# EAGLE board Smartwatch-BASIC-BOTTOM (EAGLE 9.6.2)
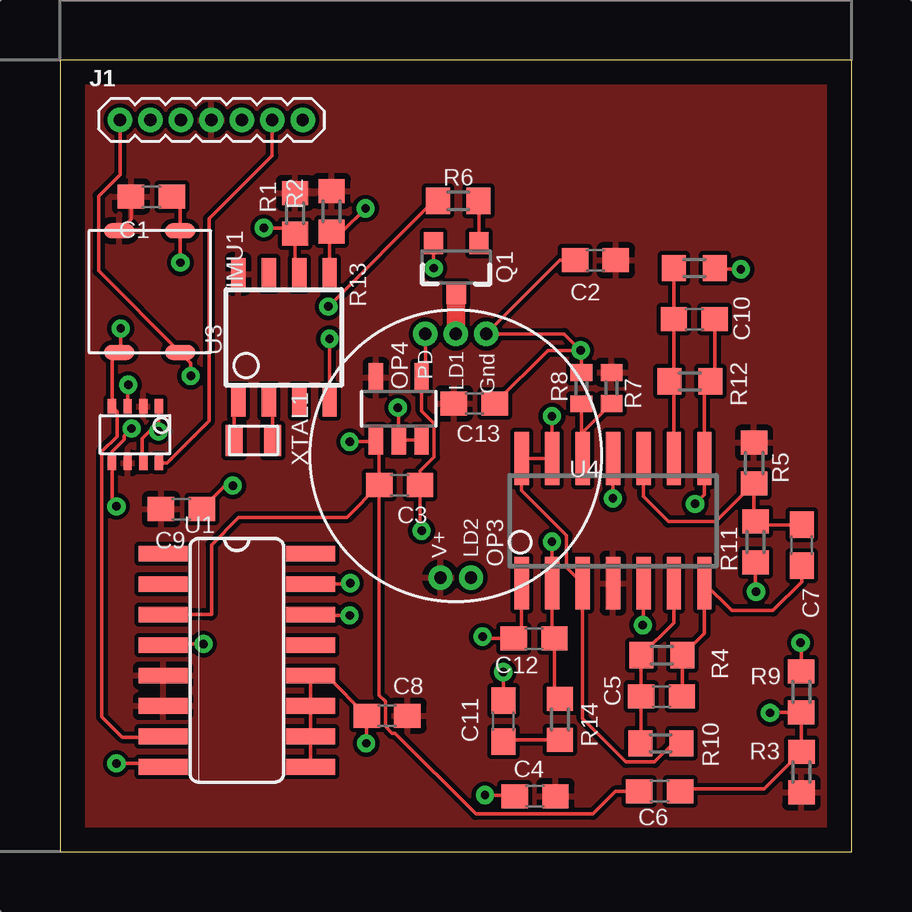
[diagram p0: board, top side]
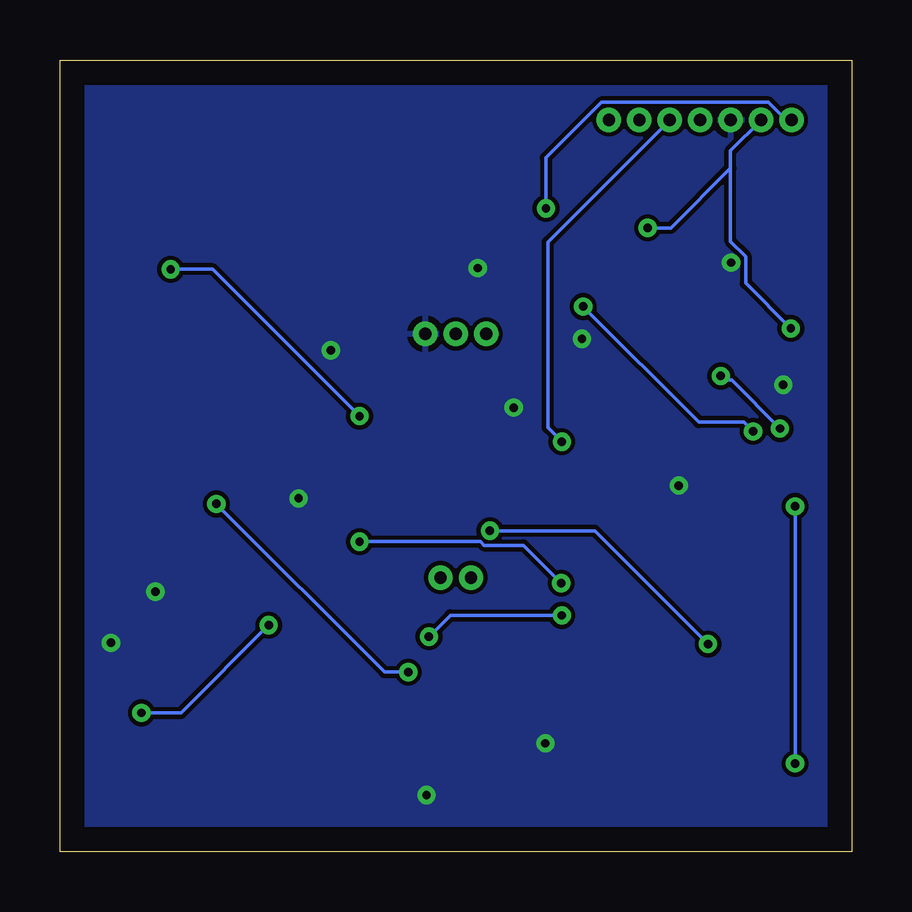
[diagram p1: board, bottom side, seen from below]

Size 33 x 33 mm. Coordinates in mm from the lower left corner, seen from the top.
Outline: 0,0 33,0 33,33 0,33 0,0
Copper layers (1*16): Top 0.035mm / dielectric 1.5mm / Bottom 0.035mm
Design rules "default": minimum track width 6mil, minimum drill 0.35mm, track to track 6mil, track to pad 6mil, pad to pad 6mil, via to via 6mil, smd to smd 6mil, copper to edge 40mil, drill to drill 6mil, minimum pad ring 10mil, minimum via ring 8mil, stop-mask expansion 4mil, vias tented up to drill 0mil, thermal gap 10mil

## Footprints (pad centres in the part's own frame; a part is rotated, then mirrored left to right if it is on the bottom)
C0603 = smd 1.1 x 1: 1 -0.85,0; 2 0.85,0
LSM6DS3_CAST = smd 0.635 x 1.27: 1 -2.54,1.27; 2 -2.54,-1.27; 3 2.54,-1.27; 4 2.54,1.27
1X07_1.27MM = drill 0.508 pad 1: 1 0,0; 2 1.27,0; 3 2.54,0; 4 3.81,0; 5 5.08,0; 6 6.35,0; 7 7.62,0
SO14 = smd 0.6 x 2.2: 1 -3.81,-2.6; 2 -2.54,-2.6; 3 -1.27,-2.6; 4 0,-2.6; 5 1.27,-2.6; 6 2.54,-2.6; 7 3.81,-2.6; 8 3.81,2.6; 9 2.54,2.6; 10 1.27,2.6; 11 0,2.6; 12 -1.27,2.6; 13 -2.54,2.6; 14 -3.81,2.6
SOT23-5 = smd 0.6 x 1.2: 1 -0.95,-1.306; 2 0,-1.306; 3 0.95,-1.306; 4 0.95,1.306; 5 -0.95,1.306
SOT23-3 = smd 0.8 x 0.9: 1 -0.95,-1; 2 0.95,-1; 3 0,1.1
R0603 = smd 1 x 1.1: 1 -0.85,0; 2 0.85,0
R0402 = smd 0.7 x 0.9: 1 -0.65,0; 2 0.65,0
SO16 = smd 0.66 x 2.032: 1 -4.445,-3.073; 2 -3.175,-3.073; 3 -1.905,-3.073; 4 -0.635,-3.073; 5 0.635,-3.073; 6 1.905,-3.073; 7 3.175,-3.073; 8 4.445,-3.073; 9 4.445,3.073; 10 3.175,3.073; 11 1.905,3.073; 12 0.635,3.073; 13 -0.635,3.073; 14 -1.905,3.073; 15 -3.175,3.073; 16 -4.445,3.073
PPG.MODULE.2 = drill 0.508 pad 0.94: GND 1.27,5.08; LD1 0,5.08; LD2 0.635,-5.08; PD -1.27,5.08; V+ -0.635,-5.08
SO8 = smd 1.3 x 0.6: 1 -2.65,1.905; 2 -2.65,0.635; 3 -2.65,-0.635; 4 -2.65,-1.905; 5 2.65,-1.905; 6 2.65,-0.635; 7 2.65,0.635; 8 2.65,1.905
SOT-23-8 = smd 0.35 x 0.6: 1 -0.991,-1.176; 2 -0.341,-1.176; 3 0.309,-1.176; 4 0.959,-1.176; 5 0.959,1.176; 6 0.309,1.176; 7 -0.341,1.176; 8 -0.991,1.176
2-SMD.NOLEAD.2.0MMTO1.2MM = smd 0.7 x 1.3: P$1 -0.8,0; P$2 0.8,0

## Placement (x,y rotation side)
C1  100n  [C0603]  3.81,27.3 180 top
C2  1u  [C0603]  22.32,24.65 180 top
C3  100n  [C0603]  14.16,15.28 180 top
C4  100n  [C0603]  19.81,2.31 0 top
C5  2.2n  [C0603]  25.07,6.47 180 top
C6  2.2u  [C0603]  25,2.51 0 top
C7  2.2u  [C0603]  30.92,12.77 90 top
C8  100n  [C0603]  13.63,5.66 0 top
C9  100n  [C0603]  5.06,14.28 180 top
C10  2.2n  [C0603]  26.44,22.19 180 top
C11  22u  [C0603]  18.48,5.44 270 top
C12  22n  [C0603]  19.76,8.88 180 top
C13  100n  [C0603]  17.27,18.68 180 top
IMU1  LSM6DS3_CAST  [LSM6DS3_CAST]  3.74,23.34 270 top
J1  [1X07_1.27MM]  2.5,30.5 0 top
OP3  [SO14]  23.06,13.79 0 top
OP4  [SOT23-5]  14.12,18.45 0 top
Q1  [SOT23-3]  16.52,24.36 180 top
R1  10k  [R0603]  9.8,26.61 90 top
R2  10k  [R0603]  11.32,26.68 90 top
R3  220k  [R0603]  30.91,3.31 270 top
R4  10M  [R0603]  25.09,8.19 0 top
R5  220k  [R0603]  28.94,16.2 90 top
R6  [R0603]  16.61,27.13 0 top
R7  10k  [R0402]  22.99,19.32 90 top
R8  10k  [R0402]  21.74,19.31 270 top
R9  220k  [R0603]  30.9,6.66 270 top
R10  1M  [R0603]  25.05,4.51 180 top
R11  220k  [R0603]  29,12.9 90 top
R12  10M  [R0603]  26.27,19.6 0 top
R13  1M  [R0603]  26.44,24.32 180 top
R14  10k  [R0603]  20.84,5.51 270 top
U1  AD5242-SO16  [SO16]  7.37,7.97 270 top
U2  [PPG.MODULE.2]  16.5,16.5 0 top
U3  PCF8523  [SO8]  9.34,21.43 90 top
U4  AD5171  [SOT-23-8]  3.13,17.38 180 top
XTAL1  32.7680kHz  [2-SMD.NOLEAD.2.0MMTO1.2MM]  8.07,17.14 180 top

## Library data of the parts
C1-C13 R1-R14 = LinnesLab-Passives
IMU1 = LinnesLab-Sensors
J1 U2 = LinnesLab-Connectors
OP3 OP4 = LinnesLab-AnalogIC
Q1 = LinnesLab-DiscreteSemi
U1 U4 = LinnesLab-DigitalIC
U3 = LinnesLab-Clocks; DIGIKEY: 568-5306-1-ND; I2C_ADDRESS: 0x68h; MFN: PCF8523T/1,118; MFN_MANUFACTURER: NXP USA Inc.
XTAL1 = LinnesLab-Clocks; DIGIKEY: XC2288CT-ND; FREQ: 32.7680KHZ; LOAD_CAP: 12.5pF

## Nets
3.3V: C1.2 C2.1 C4.2 C8.2 C9.2 C13.2 IMU1.2 J1.4 OP3.4 OP4.5 R1.2 R2.2 R3.2 R5.2 R7.2 U1.5 U1.6 U2.V+ U3.8 U4.2 U4.6
A6/TIA: C3.2 C6.1 J1.5 OP4.1 U1.3
A7/PPG: J1.7
D26/LED.CTRL: J1.6 U4.8
G.A1: U1.2
G.A2: U1.16
G.O1: U1.1
G.O2: U1.13
G.W2: C12.1 OP3.2 R14.1 U1.15
GND: C1.1 C2.2 C4.1 C8.1 C9.1 C13.1 IMU1.1 J1.3 OP3.11 OP4.2 OP4.3 Q1.2 R8.1 R9.1 R11.1 U1.9 U1.10 U1.11 U1.12 U2.GND U3.4 U4.3
LED.C: Q1.3 U2.LD1
N$2: U3.2 XTAL1.P$1
N$3: U3.1 XTAL1.P$2
N$8: Q1.1 R6.2
N$9: R6.1 U4.1 U4.7
N$10: OP3.12 R7.1 R8.2
N$13: C6.2 OP3.5 R3.1 R9.2
N$15: C5.2 OP3.6 R4.1 R10.2
N$16: C5.1 C7.1 OP3.7 R4.2
N$17: C7.2 OP3.10 R5.1 R11.2
N$18: C10.2 OP3.9 R12.1 R13.2
N$19: C10.1 C11.1 OP3.8 R12.2
N$20: C11.2 R14.2
PD.C: C3.1 OP4.4 U1.4 U2.PD
PPG: C12.2 OP3.1 U1.14
SCL: IMU1.3 J1.2 R1.1 U1.7 U3.6 U4.4
SDA: IMU1.4 J1.1 R2.1 U1.8 U3.5 U4.5
VBATT: U3.3
VREF: OP3.3 OP3.13 OP3.14 R10.1 R13.1

## Tracks (layer width: path | path; a pad name or v marks a point on that pad's centre or on a via)
3.3V
  Top 0.152: C1.2 2.96,26.37 IMU1.2
  pour Top (isolate 0.178): 0.57,32.2 32.55,32.2 32.55,0.19 0.57,0.19
A6/TIA  (via drill 0.35)
  Top 0.152: C6.1 23.16,2.51 22.21,1.56 17.34,1.56 13.97,4.93 13.84,4.93 13.56,5.21 13.56,6.26 13.31,6.51 C3.2 | C3.2 13.31,17.01 OP4.1 13.11,17.08 v12.08,17.08 | C3.2 11.96,13.93 7.46,13.93 6.31,12.79 6.31,9.89 6.29,9.88 U1.3
  Bottom 0.152: v12.08,17.08 12.66,17.67 12.66,25.42 J1.5
D26/LED.CTRL
  Top 0.152: U4.8 4.47,16.2 6.21,17.95 6.21,26.38 8.85,29.02 J1.6
G.W2  (via drill 0.35)
  Top 0.152: R14.1 20.61,6.59 C12.1 20.52,8.98 OP3.2 v20.52,12.91 v20.51,12.92 | v12.11,11.19 12.06,11.15 U1.15
  Bottom 0.152: v20.51,12.92 15.48,12.92 15.33,12.77 13.68,12.77 v12.11,11.19
GND  (via drill 0.35)
  Top 0.152: R11.1 29,10.86 v29.02,10.84 | R9.1 30.9,8.68 v30.88,8.7 | C4.1 18.91,2.35 v17.72,2.35 | OP3.11 v23.05,14.72 | v11.24,21.38 U3.4 | v5.02,24.55 v5.01,24.56 IMU1.1 5.01,26.95 C1.1 | Q1.2 15.57,24.31 v15.59,24.32 | C2.2 20.84,24.65 U2.GND 21.02,21.58 v21.71,20.89 | v12.77,4.51 12.79,4.53 C8.1 11.11,7.34 10.48,7.34 | U1.12 10.48,7.34 | v14.09,18.51 14.12,18.47 OP4.2 OP4.3 | R8.1 21.74,20.86 v21.71,20.89 | U4.3 2.82,19.44 v2.85,19.46 | U1.9 U1.10 U1.11 10.45,7.3 10.48,7.34 | C13.1 20.33,20.89 v21.71,20.89 | C9.1 6.89,15.25 v7.2,15.25
  pour Bottom (isolate 0.178): 0.5,32.02 32.04,32.02 32.04,1.06 0.5,1.06
LED.C
  Top 0.762: Q1.3 16.52,21.6 U2.LD1
N$2
  Top 0.152: XTAL1.P$1 8.87,18.62 U3.2
N$3
  Top 0.152: XTAL1.P$2 7.27,18.62 U3.1
N$8
  Top 0.152: R6.2 17.47,27.11 Q1.1
N$9  (via drill 0.35)
  Top 0.152: U4.1 4.12,17.54 v4.1,17.52 3.72,17.52 3.42,17.21 3.42,16.25 U4.7 | v11.19,22.72 15.59,27.13 R6.1
  Bottom 0.152: v4.1,17.52 4.49,17.9 6.37,17.9 v11.19,22.72
N$10
  Top 0.152: R8.2 21.74,16.43 OP3.12 21.79,17.47 R7.1
N$13  (via drill 0.35)
  Top 0.152: C6.2 25.95,2.61 29.36,2.61 R3.1 30.91,5.8 R9.2 29.63,5.81 v29.61,5.78 | v24.3,9.44 24.32,9.47 OP3.5
  Bottom 0.152: v29.61,5.78 27.95,5.78 v24.3,9.44
N$15
  Top 0.152: OP3.6 25.59,9.54 R4.1 24.23,8.17 C5.2 24.23,4.54 R10.2
N$16
  Top 0.152: R4.2 25.94,8.17 | 25.94,8.17 25.94,6.49 C5.1 | C7.1 30.92,11.23 29.73,10.04 28.01,10.04 OP3.7 26.86,9.09 25.94,8.17
N$17
  Top 0.152: C7.2 29.13,13.62 R11.2 28.94,13.82 R5.1 27.34,13.76 25.36,13.76 24.32,14.8 OP3.10
N$18
  Top 0.152: R13.2 C10.2 25.59,19.78 R12.1 25.59,19.42 OP3.9
N$19  (via drill 0.35)
  Top 0.152: R12.2 27.11,19.42 | C10.1 27.29,19.6 27.11,19.42 | C11.1 v18.48,7.48 | v26.48,14.49 26.86,14.88 OP3.8 26.86,19.17 27.11,19.42
  Bottom 0.152: v26.48,14.49 19.47,7.48 v18.48,7.48
N$20
  Top 0.152: R14.2 18.56,4.66 C11.2
PD.C  (via drill 0.35)
  Top 0.152: U2.PD 15.23,19.92 OP4.4 15.07,18.37 15.6,17.84 15.6,16.45 15.01,15.86 C3.1 15.01,13.44 v15.08,13.38 | U1.4 4.34,8.65 v5.98,8.65
  Bottom 0.152: v5.98,8.65 10.71,13.38 v15.08,13.38
PPG  (via drill 0.35)
  Top 0.152: OP3.1 19.25,9.21 C12.2 17.69,8.88 v17.62,8.96 | v12.08,9.84 10.48,9.84 U1.14
  Bottom 0.152: v12.08,9.84 16.73,9.84 v17.62,8.96
SCL  (via drill 0.35)
  Top 0.152: U3.6 9.8,24.25 R1.1 9.72,25.76 9.48,26 v8.5,26 | v2.53,21.81 2.53,20.86 IMU1.3 2.17,20.51 U4.4 2.38,18.35 2.38,17.3 1.75,16.67 1.75,5.62 2.6,4.76 4.27,4.76 U1.7
  Bottom 0.152: v2.53,21.81 4.41,23.69 4.41,24.8 5.04,25.43 5.04,28.49 | 5.04,28.49 7.53,26 v8.5,26 | 5.04,28.49 5.04,29.23 J1.2
SDA  (via drill 0.35)
  Top 0.152: U3.5 11.24,25.75 R2.1 11.76,25.83 v12.74,26.81 | U1.8 4.14,3.67 v2.35,3.67 | J1.1 2.5,28.21 1.61,27.32 1.61,24.21 IMU1.4 5.45,20.37 v5.45,19.83 | v2.35,14.39 2.17,14.57 U4.5 2.17,16.67 2.68,17.18 2.68,17.33 v2.98,17.63
  Bottom 0.152: v5.45,19.83 5.27,19.65 5,19.65 v2.98,17.63 | v2.35,14.39 v2.35,3.67 | J1.1 2.73,30.5 3.46,31.24 10.43,31.24 12.74,28.92 v12.74,26.81
VREF  (via drill 0.35)
  Top 0.152: R10.1 25.57,4.51 24.79,3.73 23.6,3.73 21.79,5.55 OP3.3 21.12,11.85 21.12,13.17 19.25,15.04 OP3.14 OP3.13 v20.52,18.15 v20.51,18.15 | v28.39,24.27 27.34,24.27 R13.1
  Bottom 0.152: v20.51,18.15 26.63,24.27 v28.39,24.27